# EAGLE board multiboard (EAGLE 6.3)

Size 100.97 x 43.18 mm. Coordinates in mm from the lower left corner, seen from the top.
Outline: 0,0 0,43.18 24.13,43.18 24.13,0 0,0
Outline: 25.4,34.29 27.94,34.29 27.94,36.83 62.23,36.83 62.23,8.89 27.94,8.89 27.94,11.43 25.4,11.43 25.4,34.29
Outline: 64.14,34.29 66.67,34.29 66.67,36.83 100.97,36.83 100.97,8.89 66.67,8.89 66.67,11.43 64.14,11.43 64.14,34.29
Copper layers (1*16): Top 0.035mm / dielectric 1mm / Bottom 0.035mm
Design rules "default *": minimum track width 10mil, minimum drill 24mil, track to track 8mil, track to pad 8mil, pad to pad 8mil, via to via 8mil, smd to smd 8mil, copper to edge 40mil, drill to drill 8mil, minimum pad ring 10mil, minimum via ring 8mil, stop-mask expansion 4mil, vias tented up to drill 0mil, thermal gap 10mil
Milling: 8 lines

## Footprints (pad centres in the part's own frame; a part is rotated, then mirrored left to right if it is on the bottom)
C0805 = smd 1.3 x 1.5: 1 -0.95,0; 2 0.95,0

## Placement (x,y rotation side)
E$7  [C0805]  5.08,20.32 0 top
E$10  [C0805]  56.52,19.05 180 top
E$13  [C0805]  85.72,23.5 270 top

## Library data of the parts
E$7 E$10 E$13 = rcl

## Text on the board
Assembly: angle=-90 | axis=0,1,0 | position=18.51,0,-27.44 | position=12.06,0,-66.175 | axis=0,1,0 | angle=-90